# Altium PCB 9696彩屏（残疾版）.PcbDoc
Units mm, origin at the board's own origin, x right, y up, seen from the top; angles counter-clockwise.
Board outline 35.25 x 45.34 mm, 2 copper layers (Top Layer, Bottom Layer); 23 components, 37 nets, 114 pads, 37 vias.
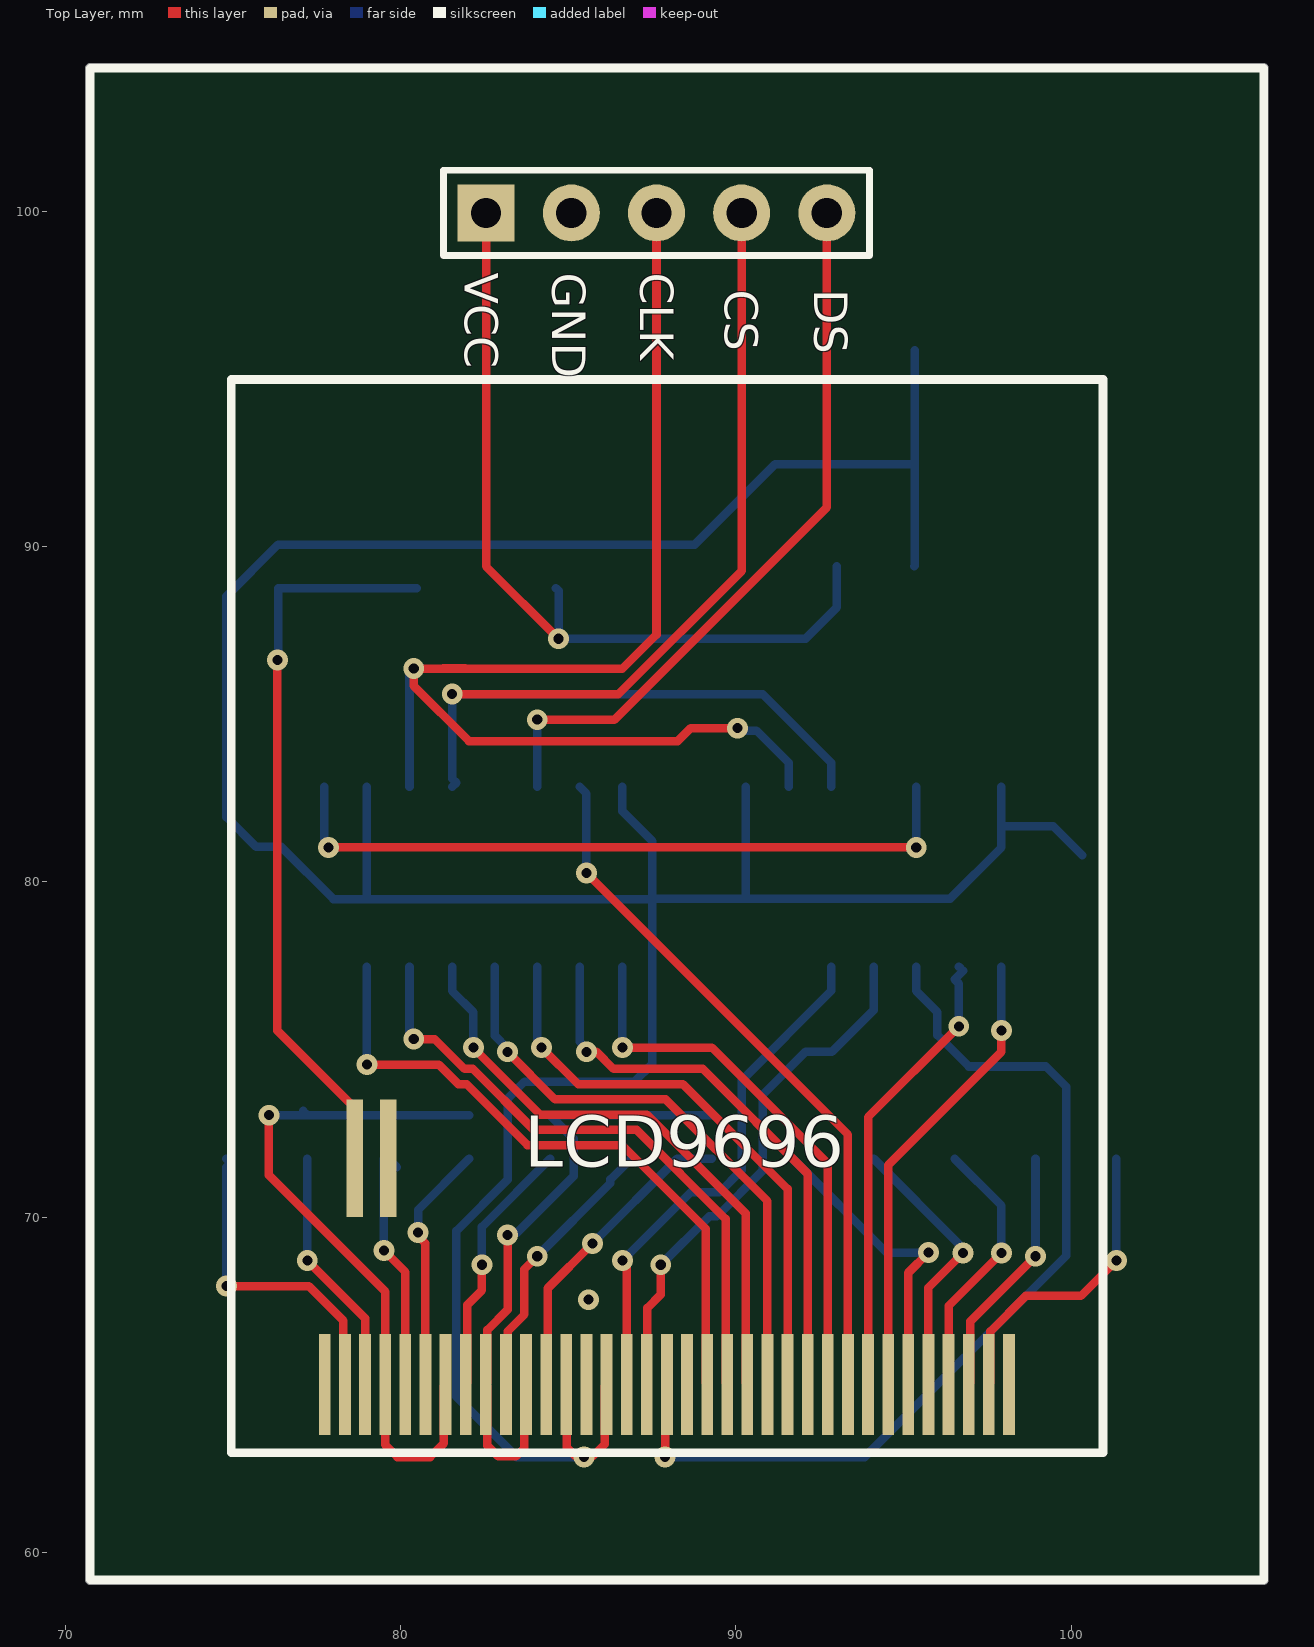
[diagram p0: Top Layer view]
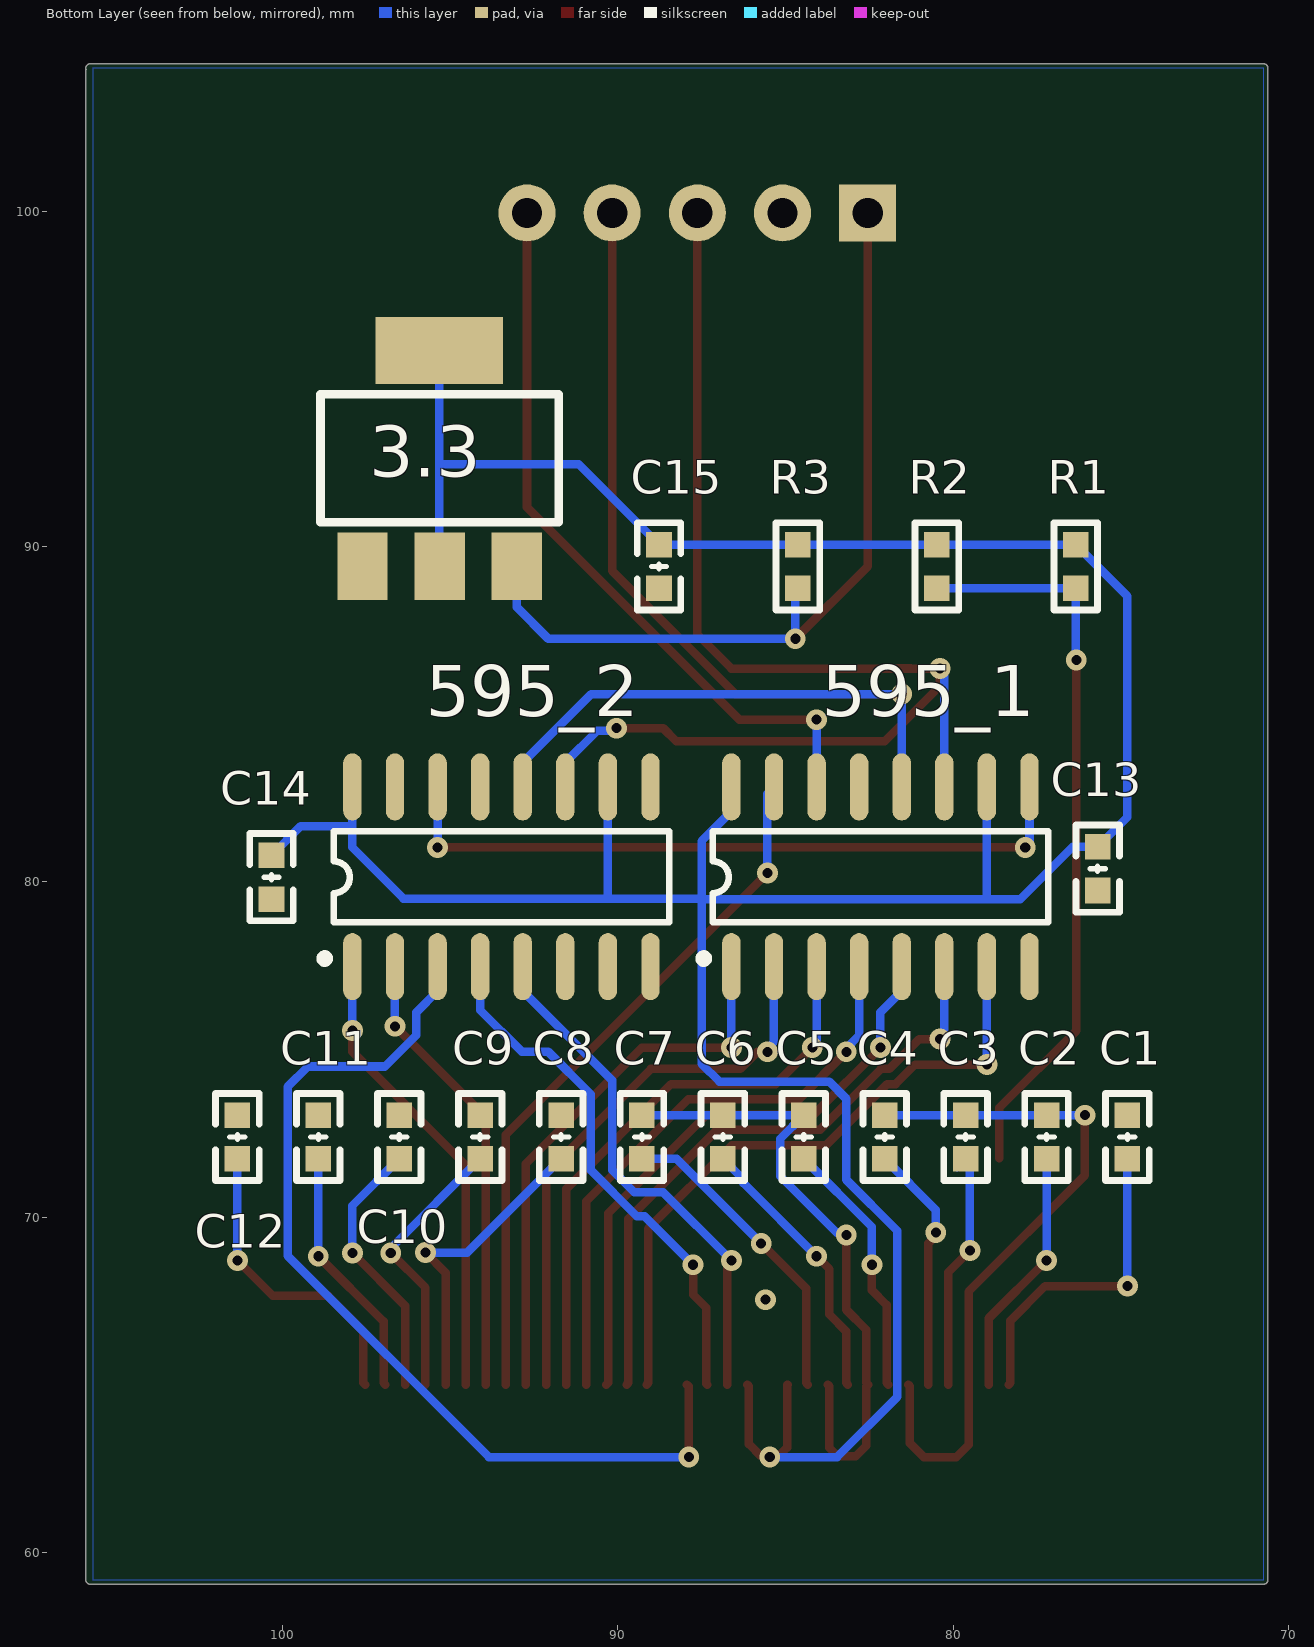
[diagram p1: Bottom Layer view, seen from below]

## Layer stack, top to bottom
Top Solder: solder mask 0.0102, Solder Resist, Dk 3.5
Top Layer: signal copper 0.0356
Dielectric 1: dielectric 0.32, FR-4, Dk 4.8
Bottom Layer: signal copper 0.0356
Bottom Solder: solder mask 0.0102, Solder Resist, Dk 3.5

## Board outline
70.612,59.182 ccw(c70.739,59.182) 70.739,59.055 105.739,59.055 ccw(c105.739,59.182) 105.866,59.182 105.866,104.182 ccw(c105.739,104.182) 105.859,104.224 105.859,104.225 ccw(c105.739,104.267) 105.866,104.267 ccw(c105.739,104.267) 105.739,104.394 70.739,104.394 ccw(c70.739,104.267) 70.612,104.267

## Design rules (kind name [scope] priority, off if disabled: settings)
AssemblyTestPointUsage [All] p0: scope1count=1 scope1_0_kind=Board scope1_0_value=Board scope2count=1 scope2_0_kind=Board scope2_0_value=Board commentlength=0
AssemblyTestpoint [All] p0: scope1count=1 scope1_0_kind=Board scope1_0_value=Board scope2count=1 scope2_0_kind=Board scope2_0_value=Board commentlength=0
Clearance [All] p0: scope1count=1 scope1_0_kind=Board scope1_0_value=Board scope2count=1 scope2_0_kind=Board scope2_0_value=Board commentlength=0 gap=0.254
Clearance [All] p1: gap=0.254 ignorepadtopadclearanceinfootprint=TRUE except(0: Arc-Hole Track-Hole SMDPad-Hole THPad-Hole Via-Hole Fill-Hole Poly-Hole Region-Hole Text-Hole; 0.2: Arc-Arc Arc-Track Arc-SMDPad Arc-THPad Arc-Via Arc-Fill Arc-Poly Arc-Region Arc-Text Track-Track Track-SMDPad Track-THPad Track-Via Track-Fill Track-Poly Track-Region Track-Text)
ComponentClearance [All] p0: scope1count=1 scope1_0_kind=Board scope1_0_value=Board scope2count=1 scope2_0_kind=Board scope2_0_value=Board commentlength=0 gap=0.254 collisioncheckmode=3
DiffPairsRouting [All] p0: scope1count=1 scope1_0_kind=Board scope1_0_value=Board scope2count=1 scope2_0_kind=Board scope2_0_value=Board commentlength=0
FabricationTestPointUsage [All] p0: scope1count=1 scope1_0_kind=Board scope1_0_value=Board scope2count=1 scope2_0_kind=Board scope2_0_value=Board commentlength=0 valid=0 allowmultiple=FALSE
FabricationTestpoint [All] p0: scope1count=1 scope1_0_kind=Board scope1_0_value=Board scope2count=1 scope2_0_kind=Board scope2_0_value=Board commentlength=0 side=3 testpointundercomponent=TRUE minsize=1.016 maxsize=2.54 preferedsize=1.524 minholesize=0 maxholesize=1.016 preferedholesize=0.813 testpointgrid=0.025
FanoutControl Fanout_BGA [All] p0 off: scope1count=1 scope1_0_kind=Board scope1_0_value=Board scope2count=1 scope2_0_kind=Board scope2_0_value=Board commentlength=69 // Protel DXP Scope 1 Expression Was: IsBGA   Fanout_BGA (Default Rule)
FanoutControl Fanout_LCC [All] p0 off: scope1count=1 scope1_0_kind=Board scope1_0_value=Board scope2count=1 scope2_0_kind=Board scope2_0_value=Board commentlength=69 // Protel DXP Scope 1 Expression Was: IsLCC   Fanout_LCC (Default Rule)
FanoutControl Fanout_SOIC [All] p0 off: scope1count=1 scope1_0_kind=Board scope1_0_value=Board scope2count=1 scope2_0_kind=Board scope2_0_value=Board commentlength=71 // Protel DXP Scope 1 Expression Was: IsSOIC   Fanout_SOIC (Default Rule)
FanoutControl Fanout_Small [All] p0 off: scope1count=1 scope1_0_kind=Board scope1_0_value=Board scope2count=1 scope2_0_kind=Board scope2_0_value=Board commentlength=84 // Protel DXP Scope 1 Expression Was: (CompPinCount < 5)   Fanout_Small (Default Rule)
FanoutControl Fanout_Default [All] p0: scope1count=1 scope1_0_kind=Board scope1_0_value=Board scope2count=1 scope2_0_kind=Board scope2_0_value=Board commentlength=30 // Fanout_Default (Default Rule)
Height [All] p0: scope1count=1 scope1_0_kind=Board scope1_0_value=Board scope2count=1 scope2_0_kind=Board scope2_0_value=Board commentlength=0
HoleSize [All] p0: scope1count=1 scope1_0_kind=Board scope1_0_value=Board scope2count=1 scope2_0_kind=Board scope2_0_value=Board commentlength=0 absolutevalues=TRUE maxlimit=2.54 minlimit=0.025 maxpercent=80.000 minpercent=20.000
HoleToHoleClearance [All] p0: scope1count=1 scope1_0_kind=Board scope1_0_value=Board scope2count=1 scope2_0_kind=Board scope2_0_value=Board commentlength=0
LayerPairs [All] p0: scope1count=1 scope1_0_kind=Board scope1_0_value=Board scope2count=1 scope2_0_kind=Board scope2_0_value=Board commentlength=0 enforce=TRUE
MinimumSolderMaskSliver [All] p0: scope1count=1 scope1_0_kind=Board scope1_0_value=Board scope2count=1 scope2_0_kind=Board scope2_0_value=Board commentlength=0
NetAntennae [All] p0: scope1count=1 scope1_0_kind=Board scope1_0_value=Board scope2count=1 scope2_0_kind=Board scope2_0_value=Board commentlength=0
PasteMaskExpansion [All] p0: scope1count=1 scope1_0_kind=Board scope1_0_value=Board scope2count=1 scope2_0_kind=Board scope2_0_value=Board commentlength=0 expansion=0
PlaneClearance [All] p0: scope1count=1 scope1_0_kind=Board scope1_0_value=Board scope2count=1 scope2_0_kind=Board scope2_0_value=Board commentlength=0 clearance=0.508
PlaneConnect [All] p0: scope1count=1 scope1_0_kind=Board scope1_0_value=Board scope2count=1 scope2_0_kind=Board scope2_0_value=Board commentlength=0 planeconnectstyle=Relief reliefexpansion=0.508 reliefentries=4 reliefconductorwidth=0.254 reliefairgap=0.254
PolygonConnect [All] p0: scope1count=1 scope1_0_kind=Board scope1_0_value=Board scope2count=1 scope2_0_kind=Board scope2_0_value=Board commentlength=0 connectstyle=Relief reliefconductorwidth=0.254 reliefentries=4 polygonreliefangle="90 Angle"
PolygonConnect [All] p1: connectstyle=Relief reliefconductorwidth=0.254 reliefentries=4 polygonreliefangle="90 Angle" airgapwidth=0.254
RoutingCorners [All] p0: scope1count=1 scope1_0_kind=Board scope1_0_value=Board scope2count=1 scope2_0_kind=Board scope2_0_value=Board commentlength=0 cornerstyle=45-Degree minsetback=2.54 maxsetback=2.54
RoutingLayers [All] p0: scope1count=1 scope1_0_kind=Board scope1_0_value=Board scope2count=1 scope2_0_kind=Board scope2_0_value=Board commentlength=0 top layer=Automatic bottom layer=Automatic
RoutingPriority [All] p0: scope1count=1 scope1_0_kind=Board scope1_0_value=Board scope2count=1 scope2_0_kind=Board scope2_0_value=Board commentlength=0
RoutingTopology [All] p0: scope1count=1 scope1_0_kind=Board scope1_0_value=Board scope2count=1 scope2_0_kind=Board scope2_0_value=Board commentlength=0 topology=Shortest
RoutingVias [All] p0: scope1count=1 scope1_0_kind=Board scope1_0_value=Board scope2count=1 scope2_0_kind=Board scope2_0_value=Board commentlength=0 holewidth=0.711 width=1.27 viastyle="Through Hole" minholewidth=0.711 minwidth=1.27 maxholewidth=0.711 maxwidth=1.27
RoutingVias [All] p1: holewidth=0.711 width=1.27 viastyle="Through Hole" minholewidth=0.711 minwidth=1.27 maxholewidth=0.711 maxwidth=1.27
ShortCircuit [All] p0: scope1count=1 scope1_0_kind=Board scope1_0_value=Board scope2count=1 scope2_0_kind=Board scope2_0_value=Board commentlength=0 allowed=FALSE
SilkToBoardRegionClearance [All] p0: scope1count=1 scope1_0_kind=Board scope1_0_value=Board scope2count=1 scope2_0_kind=Board scope2_0_value=Board commentlength=0
SilkToSilkClearance [All] p0: scope1count=1 scope1_0_kind=Board scope1_0_value=Board scope2count=1 scope2_0_kind=Board scope2_0_value=Board commentlength=0
SilkToSolderMaskClearance [All] p0 off: scope1count=1 scope1_0_kind=Board scope1_0_value=Board scope2count=1 scope2_0_kind=Board scope2_0_value=Board commentlength=44 // Protel DXP Scope 1 Expression Was: IsPad
SolderMaskExpansion [All] p0: scope1count=1 scope1_0_kind=Board scope1_0_value=Board scope2count=1 scope2_0_kind=Board scope2_0_value=Board commentlength=0 expansion=0.102
SolderMaskExpansion [All] p1: expansion=0.102
UnRoutedNet [All] p0: scope1count=1 scope1_0_kind=Board scope1_0_value=Board scope2count=1 scope2_0_kind=Board scope2_0_value=Board commentlength=0
UnpouredPolygon [All] p0: scope1count=1 scope1_0_kind=Board scope1_0_value=Board scope2count=1 scope2_0_kind=Board scope2_0_value=Board commentlength=0
Width [All] p0: scope1count=1 scope1_0_kind=Board scope1_0_value=Board scope2count=1 scope2_0_kind=Board scope2_0_value=Board commentlength=0 maxlimit=0.254 minlimit=0.254 preferedwidth=0.254
Width [All] p1: maxlimit=0.254 minlimit=0.254 preferedwidth=0.254
30 further rules are at their usual default settings.

## Components (designator, comment, footprint, x,y, rotation, side; value= is the part's Value field where it differs from the comment)
3.3 "Comment" SOT-223 95.377,92.71 r180 bottom
595_1 "Comment" SOP16 82.169,80.137 r90 bottom
595_2 "" SOP16 93.472,80.137 r90 bottom
C1 "Comment" "C 0603_L" 74.803,72.39 r270 bottom
C2 "Comment" "C 0603_L" 77.216,72.39 r270 bottom
C3 "Comment" "C 0603_L" 79.629,72.39 r270 bottom
C4 "Comment" "C 0603_L" 82.042,72.39 r270 bottom
C5 "Comment" "C 0603_L" 84.455,72.39 r270 bottom
C6 "Comment" "C 0603_L" 86.868,72.39 r270 bottom
C7 "Comment" "C 0603_L" 89.281,72.39 r270 bottom
C8 "Comment" "C 0603_L" 91.694,72.39 r270 bottom
C9 "Comment" "C 0603_L" 94.107,72.39 r270 bottom
C10 "Comment" "C 0603_L" 96.52,72.39 r270 bottom
C11 "Comment" "C 0603_L" 98.933,72.39 r270 bottom
C12 "Comment" "C 0603_L" 101.346,72.39 r270 bottom
C13 "Comment" "C 0603_L" 75.692,80.391 r90 bottom
C14 "Comment" "C 0603_L" 100.33,80.137 r90 bottom
C15 "Comment" "C 0603_L" 88.773,89.408 r270 bottom
LCD9696 "Comment" 老五8毛9696彩屏 77.486,63.484 r0 top
R1 "Comment" "R 0603_L" 76.343,89.408 r90 bottom
R2 "Comment" "R 0603_L" 80.486,89.408 r90 bottom
R3 "Comment" "R 0603_L" 84.63,89.408 r90 bottom
? "Comment" HDR2.54-LI-5P 87.63,99.949 r0 top

## Footprints (in the part's own frame and the unit in brackets; to place one, negate y for a bottom-side part, rotate by r counter-clockwise, add the part's x,y. Pads: shape width x height; smd on the part's side, far side on the other; paste and mask are expansions set on the pad)
"C 0603_L" [mil] "无极性贴片电容                                       淘宝ID:黄晶宝石"
  rect 30x30 smd: 1(-25.59,0) 2(25.59,0)
  silkscreen extent -51,-26 51,26
HDR2.54-LI-5P [mm] "排针，5脚"
  rect 1.7x1.7 hole 0.9: 1(-5.08,0)
  round 1.7 hole 0.9: 2(-2.54,0) 3(0,0) 4(2.54,0) 5(5.08,0)
  silkscreen extent -6.35,-1.27 6.35,1.27
"R 0603_L" [mil] "1/10W贴片电阻                 淘宝ID:黄晶宝石"
  rect 30x30 smd: 1(-25.59,0) 2(25.59,0)
  silkscreen extent -51,-26 51,26
SOP16 [mm] "封装库来自淘宝卖家 ID：黄晶宝石"
  oval 2x0.55 smd: 1(-2.667,4.445) 2(-2.667,3.175) 3(-2.667,1.905) 4(-2.667,0.635) 5(-2.667,-0.635) 6(-2.667,-1.905) 7(-2.667,-3.175) 8(-2.667,-4.445) 9(2.692,-4.445) 10(2.692,-3.175) 11(2.692,-1.905) 12(2.692,-0.635) 13(2.692,0.635) 14(2.692,1.905) 15(2.692,3.175) 16(2.692,4.445)
  silkscreen extent -2.55,-5 1.37,5.4
SOT-223 [mil] "封装库来自淘宝卖家 ID：黄晶宝石"
  rect 59x79 smd: 1(-88,-130) 2(2.55,-130) 3(93.1,-130)
  rect 150x79 smd: 2(1.88,123.54)
  silkscreen extent -137,-78 143,72
老五8毛9696彩屏 [mm]
  rect 0.35x3 smd: 1(0.254,1.524) 2(0.854,1.524) 3(1.454,1.524) 4(2.054,1.524) 5(2.654,1.524) 6(3.254,1.524) 7(3.854,1.524) 8(4.454,1.524) 9(5.054,1.524) 10(5.654,1.524) 11(6.254,1.524) 12(6.854,1.524) 13(7.454,1.524) 14(8.054,1.524) 15(8.654,1.524) 16(9.254,1.524) 17(9.854,1.524) 18(10.454,1.524) 19(11.054,1.524) 20(11.654,1.524) 21(12.254,1.524) 22(12.854,1.524) 23(13.454,1.524) 24(14.054,1.524) 25(14.654,1.524) 26(15.254,1.524) 27(15.854,1.524) 28(16.454,1.524) 29(17.054,1.524) 30(17.654,1.524) 31(18.254,1.524) 32(18.854,1.524) 33(19.454,1.524) 34(20.054,1.524) 35(20.654,1.524)
  rect 0.5x3.5 smd: 36(1.143,8.271) 37(2.143,8.271)
  silkscreen extent -2.54,-0.51 23.46,31.5

## Via types
v1: diameter 0.62, hole 0.3, Top Layer to Bottom Layer, 37 vias

## Nets (pads, with @x,y where several pads share a name; then routed paths per layer and width w, separated by ;. In a path a pad name is that pad's centre, name@x,y a point inside that pad or via, vN(x,y) a via of type N, cw(c..) or ccw(c..) an arc to the next point about the centre after c; other vN are vias at no path point)
5V: 3.3.3 ?.1 R3.1 | length 25
  Top Layer w0.254: ?.1 82.55,89.408 v1(84.709,87.249)
  Bottom Layer w0.254: R3.1 84.709,88.679 v1(84.709,87.249) 92.075,87.249 93.012,88.186 3.3.3
A: LCD9696.36 R1.1 R2.1 | length 22.1
  Top Layer w0.254: v1(76.327,86.614) 76.327,75.557 78.629,73.255 LCD9696.36
  Bottom Layer w0.254: v1(76.327,86.614) 76.343,86.63 R1.1 R2.1
A0: 595_2.1 LCD9696.29 | length 13.9
  Top Layer w0.254: LCD9696.29 94.54,71.553 97.917,74.93 v1(97.917,75.565)
  Bottom Layer w0.254: v1(97.917,75.565) 595_2.1
C1N: C2.1 C3.1 C4.1 LCD9696.4 LCD9696.7 | length 21.3
  Top Layer w0.254: v1(76.073,73.04) 76.073,71.247 79.54,67.78 LCD9696.4 79.54,63.208 79.905,62.843 80.877,62.843 81.292,63.258 81.292,64.96 LCD9696.7
  Bottom Layer w0.254: v1(76.073,73.04) C2.1 ; C2.1@77.089,73.167 C2.1 ; C4.1 C3.1 C2.1
C1P: C2.2 LCD9696.3 | length 7.4
  Top Layer w0.254: v1(77.216,68.707) 78.94,66.983 LCD9696.3
  Bottom Layer w0.254: v1(77.216,68.707) C2.2
C2N: C5.1 C6.1 C7.1 LCD9696.9 LCD9696.11 | length 19.5
  Top Layer w0.254: v1(83.188,69.469) 83.188,67.236 82.588,66.636 82.588,65.056 LCD9696.9 82.588,64.96 82.588,63.186 82.909,62.865 83.438,62.865 83.692,63.119 83.692,64.96 LCD9696.11
  Bottom Layer w0.254: v1(83.188,69.469) 83.258,69.539 83.478,69.539 85.163,71.224 85.163,72.332 C5.1 C6.1 C7.1
C2P: C7.2 LCD9696.12 | length 9.4
  Top Layer w0.254: LCD9696.12 84.388,65.056 84.388,67.878 v1(85.725,69.215)
  Bottom Layer w0.254: v1(85.725,69.215) 88.25,71.74 C7.2
C3P: C3.2 LCD9696.5 | length 7.4
  Top Layer w0.254: v1(79.502,69.001) 80.14,68.363 LCD9696.5
  Bottom Layer w0.254: v1(79.502,69.001) C3.2@79.502,71.74 ; C3.2 C3.2@79.883,71.486
C4P: C5.2 LCD9696.8 | length 7.8
  Top Layer w0.254: LCD9696.8 81.988,65.056 81.988,67.384 82.423,67.819 v1(82.423,68.58)
  Bottom Layer w0.254: v1(82.423,68.58) 82.423,69.708 C5.2
C5P: C4.2 LCD9696.6 | length 7.5
  Top Layer w0.254: v1(80.518,69.539) 80.518,69.44 80.74,69.218 LCD9696.6
  Bottom Layer w0.254: v1(80.518,69.539) 80.518,70.216 C4.2
C6P: C6.2 LCD9696.10 | length 8.3
  Top Layer w0.254: LCD9696.10 83.188,65.056 83.188,66.594 83.693,67.099 83.693,68.453 v1(84.074,68.834)
  Bottom Layer w0.254: v1(84.074,68.834) 86.255,71.015 86.255,71.127 C6.2
CLK: 595_1.11 595_2.11 ?.3 | length 37.5
  Top Layer w0.254: v1(80.391,86.36) v1@80.393,86.358 ; ?.3 87.63,87.376 86.612,86.358 81.929,86.358 81.925,86.362 81.27,86.362 81.266,86.358 v1@80.393,86.358 ; v1(90.043,84.582) 88.646,84.582 88.263,84.199 82.036,84.199 80.393,85.842 v1@80.393,86.358
  Bottom Layer w0.254: 595_1.11 80.264,86.134 80.391,86.261 v1(80.391,86.36) ; v1(90.043,84.582) 90.113,84.512 90.609,84.512 91.567,83.554 595_2.11
CS: 595_2.5 LCD9696.16 | length 15.6
  Top Layer w0.254: v1(86.614,68.707) 86.614,68.608 86.74,68.482 LCD9696.16
  Bottom Layer w0.254: v1(86.614,68.707) 88.646,70.739 89.504,70.739 90.17,71.405 90.17,74.078 92.837,76.745 595_2.5
CS1: 595_1.12 595_2.12 ?.4 | length 36.6
  Top Layer w0.254: v1(81.536,85.6) 86.496,85.6 90.17,89.274 ?.4
  Bottom Layer w0.254: 595_1.12 81.661,82.956 81.536,83.081 v1(81.536,85.6) 90.791,85.6 92.837,83.554 595_2.12
D0: 595_1.15 LCD9696.27 | length 21.1
  Top Layer w0.254: v1(85.54,80.264) 93.34,72.464 LCD9696.27
  Bottom Layer w0.254: 595_1.15 85.54,82.633 v1(85.54,80.264)
D1: 595_1.1 LCD9696.26 | length 16.6
  Top Layer w0.254: v1(86.614,75.057) 89.281,75.057 92.74,71.598 LCD9696.26
  Bottom Layer w0.254: v1(86.614,75.057) 595_1.1
D2: 595_1.2 LCD9696.25 | length 17
  Top Layer w0.254: v1(85.54,74.93) 85.84,74.93 86.35,74.42 89.014,74.42 92.14,71.294 LCD9696.25
  Bottom Layer w0.254: 595_1.2 85.344,75.225 85.54,75.029 v1(85.54,74.93)
D3: 595_1.3 LCD9696.24 | length 17.4
  Top Layer w0.254: v1@84.201,75.048 84.21,75.048 85.292,73.966 88.414,73.966 91.54,70.84 LCD9696.24
  Bottom Layer w0.254: 595_1.3 84.074,75.283 84.201,75.156 v1(84.201,75.057)
D4: 595_1.4 LCD9696.23 | length 17.8
  Top Layer w0.254: v1(83.188,74.93) 84.606,73.512 87.905,73.512 90.94,70.477 LCD9696.23
  Bottom Layer w0.254: 595_1.4 82.804,75.413 83.188,75.029 v1(83.188,74.93)
D5: 595_1.5 LCD9696.22 | length 18
  Top Layer w0.254: v1(82.169,75.057) 82.169,75.048 84.159,73.058 87.343,73.058 90.292,70.109 90.292,65.056 LCD9696.22
  Bottom Layer w0.254: 595_1.5 81.534,76.745 82.169,76.11 v1(82.169,75.057)
D6: 595_1.6 LCD9696.21 | length 18.7
  Top Layer w0.254: v1(80.391,75.311) 81.014,75.311 81.905,74.42 82.155,74.42 83.971,72.604 87.035,72.604 89.692,69.947 89.692,65.056 LCD9696.21
  Bottom Layer w0.254: 595_1.6 80.264,75.537 80.391,75.41 v1(80.391,75.311)
D7: 595_1.7 LCD9696.20 | length 19.7
  Top Layer w0.254: v1(78.994,74.549) 81.134,74.549 81.717,73.966 81.967,73.966 83.783,72.15 86.6,72.15 89.092,69.658 89.092,65.056 LCD9696.20
  Bottom Layer w0.254: v1(78.994,74.549) 595_1.7
D8: 
DS: 595_1.14 ?.5 | length 22
  Top Layer w0.254: v1(84.074,84.836) 86.374,84.836 92.71,91.172 ?.5
  Bottom Layer w0.254: 595_1.14 v1(84.074,84.836)
DS1: 595_1.9 595_2.14 | length 21
  Top Layer w0.254: v1(77.851,81.026) v1(95.377,81.026)
  Bottom Layer w0.254: v1@77.724,81.153 595_1.9 ; v1(95.377,81.026) 595_2.14
GND: 3.3.1 595_1.8 595_1.13 595_2.8 595_2.13 ?.2 C1.1 C8.1 C9.1 C10.1 C11.1 C12.1 C13.1 C14.1 C15.2 LCD9696.14 LCD9696.19 LCD9696.37
  other v1: 85.598,67.538
K: 
RD: 595_2.3 LCD9696.18 | length 28.2
  Top Layer w0.254: v1@87.884,63.119 87.892,63.127 87.892,64.961 LCD9696.18
  Bottom Layer w0.254: v1(87.884,62.843) 93.843,62.843 99.844,68.844 99.844,73.892 99.244,74.492 96.946,74.492 96.01,75.428 96.01,76.112 95.377,76.745 595_2.3
RST: 595_2.4 LCD9696.17 | length 15.9
  Top Layer w0.254: LCD9696.17 87.358,65.026 87.358,67.292 87.757,67.691 v1(87.757,68.58)
  Bottom Layer w0.254: v1(87.757,68.58) 89.201,70.024 89.431,70.024 90.805,71.398 90.805,73.66 92.075,74.93 92.861,74.93 94.107,76.176 595_2.4
V0: C12.2 LCD9696.34 | length 9.3
  Top Layer w0.254: LCD9696.34 97.588,65.056 97.588,66.594 98.645,67.65 100.289,67.65 v1(101.346,68.707)
  Bottom Layer w0.254: v1(101.346,68.707) C12.2
V1: C11.2 LCD9696.33 | length 7.6
  Top Layer w0.254: LCD9696.33 96.988,65.056 96.988,66.889 v1(98.933,68.834)
  Bottom Layer w0.254: v1(98.933,68.834) C11.2
V2: C10.2 LCD9696.32 | length 8
  Top Layer w0.254: LCD9696.32 96.34,67.354 v1(97.917,68.931)
  Bottom Layer w0.254: C10.2 97.917,70.343 v1(97.917,68.931)
V3: C9.2 LCD9696.31 | length 8.3
  Top Layer w0.254: LCD9696.31 95.74,67.897 v1(96.774,68.931)
  Bottom Layer w0.254: C9.2 96.704,69.143 96.704,69.001 v1(96.774,68.931)
V4: C8.2 LCD9696.30 | length 9.4
  Top Layer w0.254: LCD9696.30 95.14,68.343 v1(95.74,68.943)
  Bottom Layer w0.254: C8.2 94.491,68.943 v1(95.74,68.943)
VDD: 3.3.2 595_1.10 595_1.16 595_2.10 595_2.16 C13.2 C14.2 C15.1 LCD9696.13 LCD9696.15 R1.2 R2.2 R3.2 | length 103.1
  Top Layer w0.254: LCD9696.13 84.955,64.994 84.955,63.127 v1@85.217,62.865 ; v1@85.725,62.865 86.092,63.232 86.092,64.96 LCD9696.15
  Bottom Layer w0.254: 78.994,79.502 595_1.10 ; v1(85.471,62.843) 83.461,62.843 81.661,64.643 81.661,69.588 83.188,71.115 83.188,73.533 83.696,74.041 86.973,74.041 87.503,74.571 87.503,79.487 77.993,79.487 76.439,81.041 C13.2 74.803,81.93 74.803,88.518 R1.2 R2.2 R3.2 C15.1 91.171,92.456 95.25,92.456 ; 595_1.16 86.614,82.104 87.503,81.215 87.503,79.502 90.297,79.502 ; 595_2.10 90.297,79.502 ; 3.3.2@95.312,89.408 95.329,89.425 3.3.2@95.329,95.848 ; 595_2.16 97.917,81.661 ; C14.2 99.456,81.661 97.917,81.661 ; 90.297,79.502 96.393,79.502 97.917,81.026 97.917,81.661
VLCD: C1.2 LCD9696.2 | length 9.7
  Top Layer w0.254: v1(74.803,67.945) 77.258,67.945 78.292,66.911 78.292,65.056 LCD9696.2
  Bottom Layer w0.254: v1(74.803,67.945) 74.803,71.486 74.93,71.613 C1.2
WR: 595_2.2 LCD9696.28 | length 13.8
  Top Layer w0.254: LCD9696.28 93.94,72.985 v1(96.647,75.692)
  Bottom Layer w0.254: v1(96.647,75.692) 96.647,76.962 96.52,77.089 96.774,77.343 595_2.2
pads on no net: 595_2.6 595_2.7 595_2.9 595_2.15 LCD9696.1 LCD9696.35

## Polygon pours and split planes (outlines as drawn)
GND on Top Layer "Top Layer-GND" (solid, pour order 0): 70.739,104.267 105.664,104.267 105.664,59.309 105.791,59.182 70.739,59.182
GND on Bottom Layer "Bottom Layer-GND" (solid, pour order 2): 70.739,104.267 105.664,104.267 105.664,59.182 70.739,59.182

## Silkscreen, mask and mechanical layers (free items; w line width, h text height)
Top Overlay:
  lines w0.254: 105.739,104.182 105.739,59.182 70.739,59.182 70.739,104.267 105.739,104.267
  text "VCC" at 81.915,98.171 h1 r270
  text "GND" at 84.518,98.171 h1 r270
  text "CLK" at 87.142,98.171 h1 r270
  text "CS" at 89.662,97.663 h1 r270
  text "DS" at 92.329,97.671 h1 r270